# Altium PCB HW_FPGA_Board.PcbDoc
Units mm, origin at the board's own origin, x right, y up, seen from the top; angles counter-clockwise.
Board outline 100 x 100 mm, 2 copper layers (Top Layer, Bottom Layer); 81 components, 29 nets, 606 pads, 100 vias.
Unrouted connection lines stored in the file: 200.
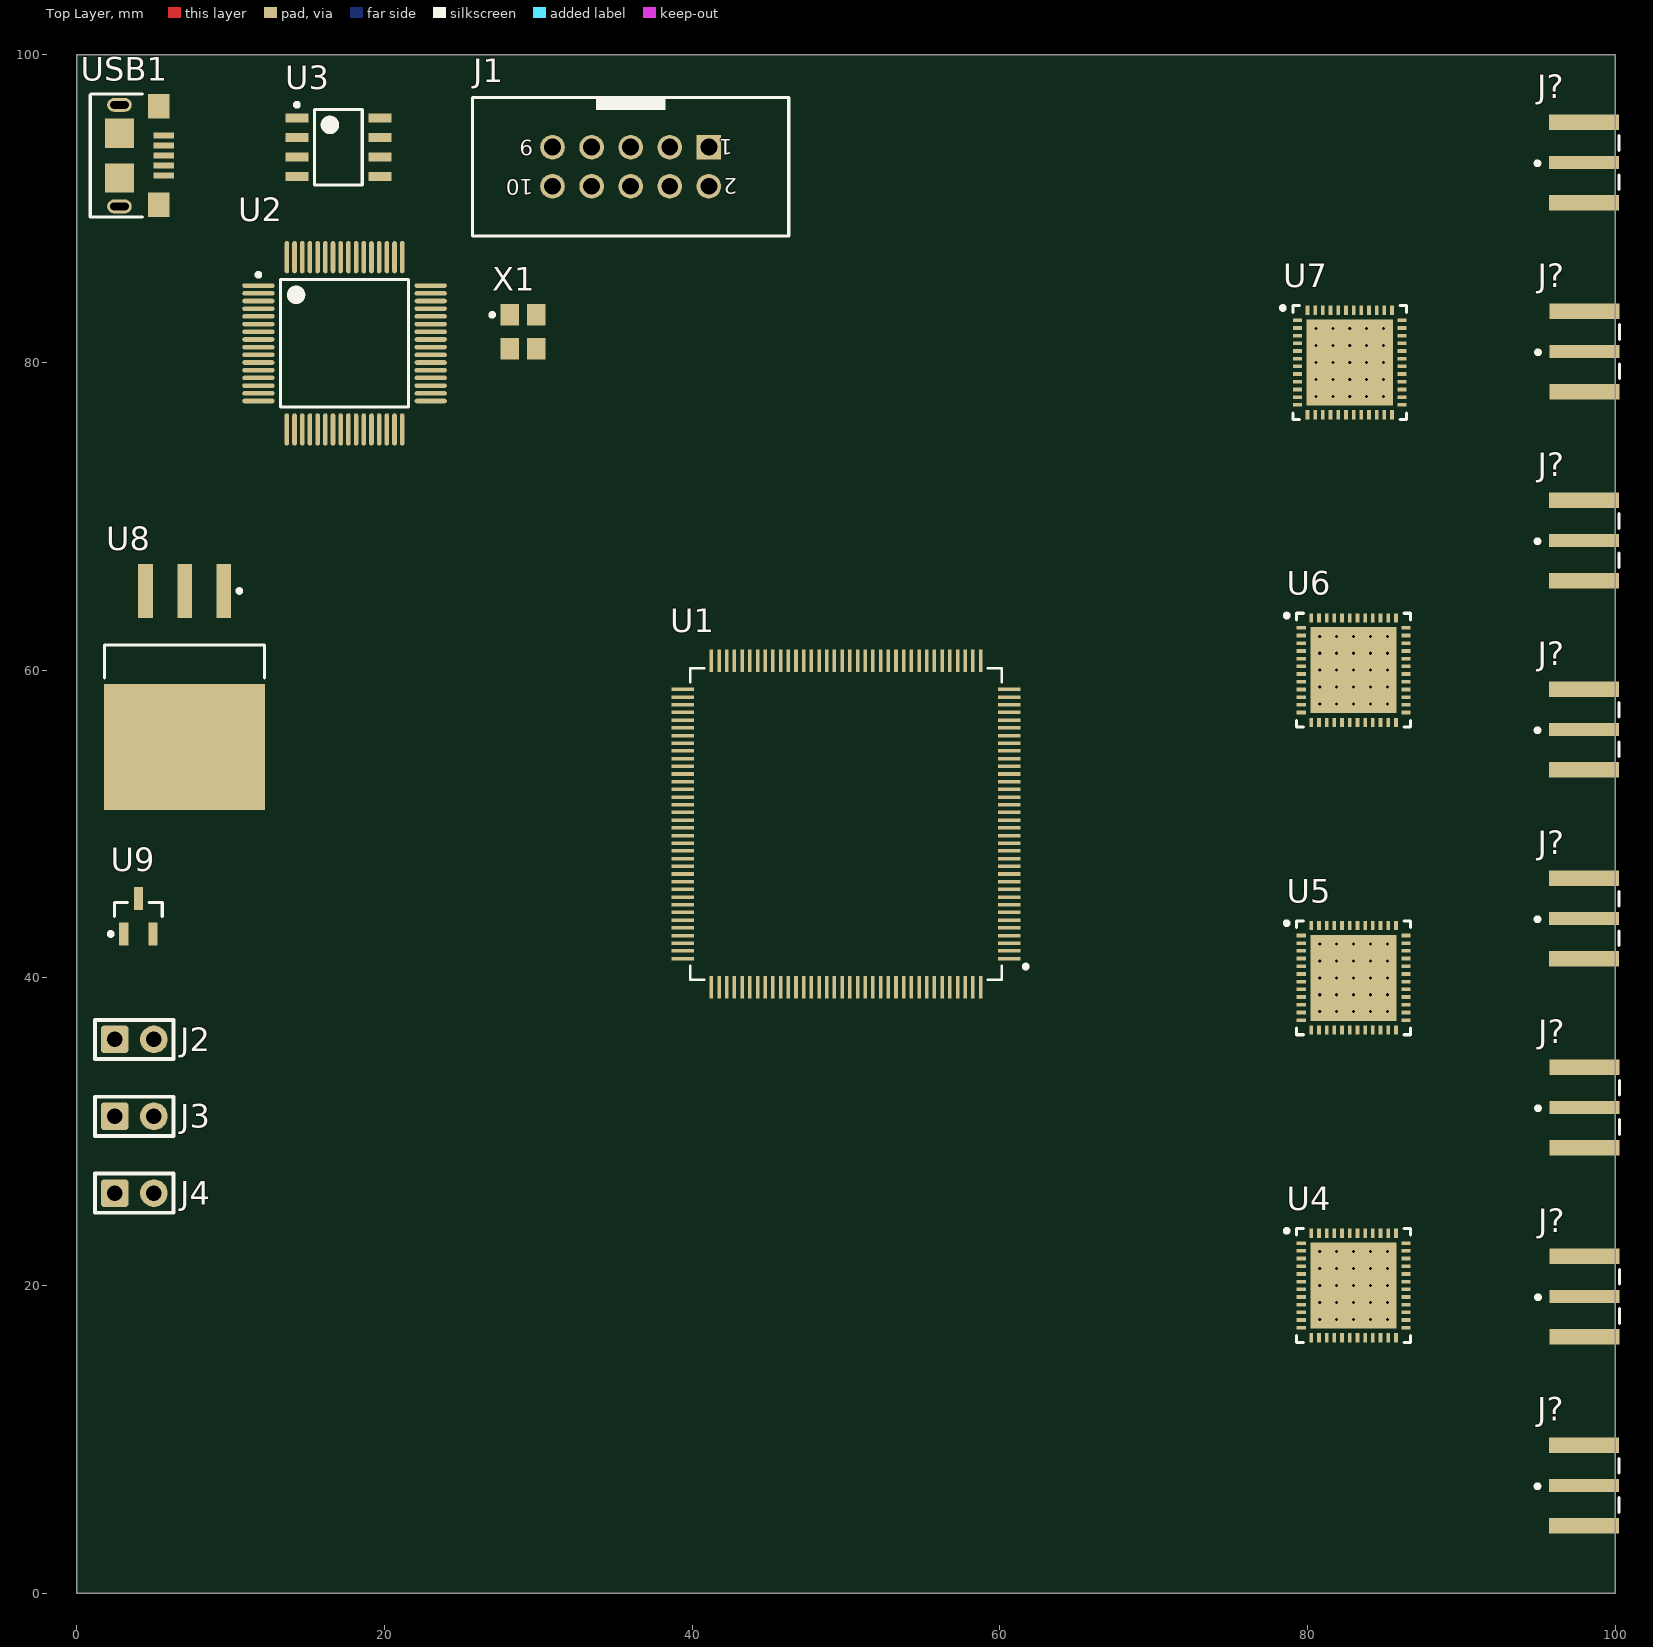
[diagram p0: Top Layer view]
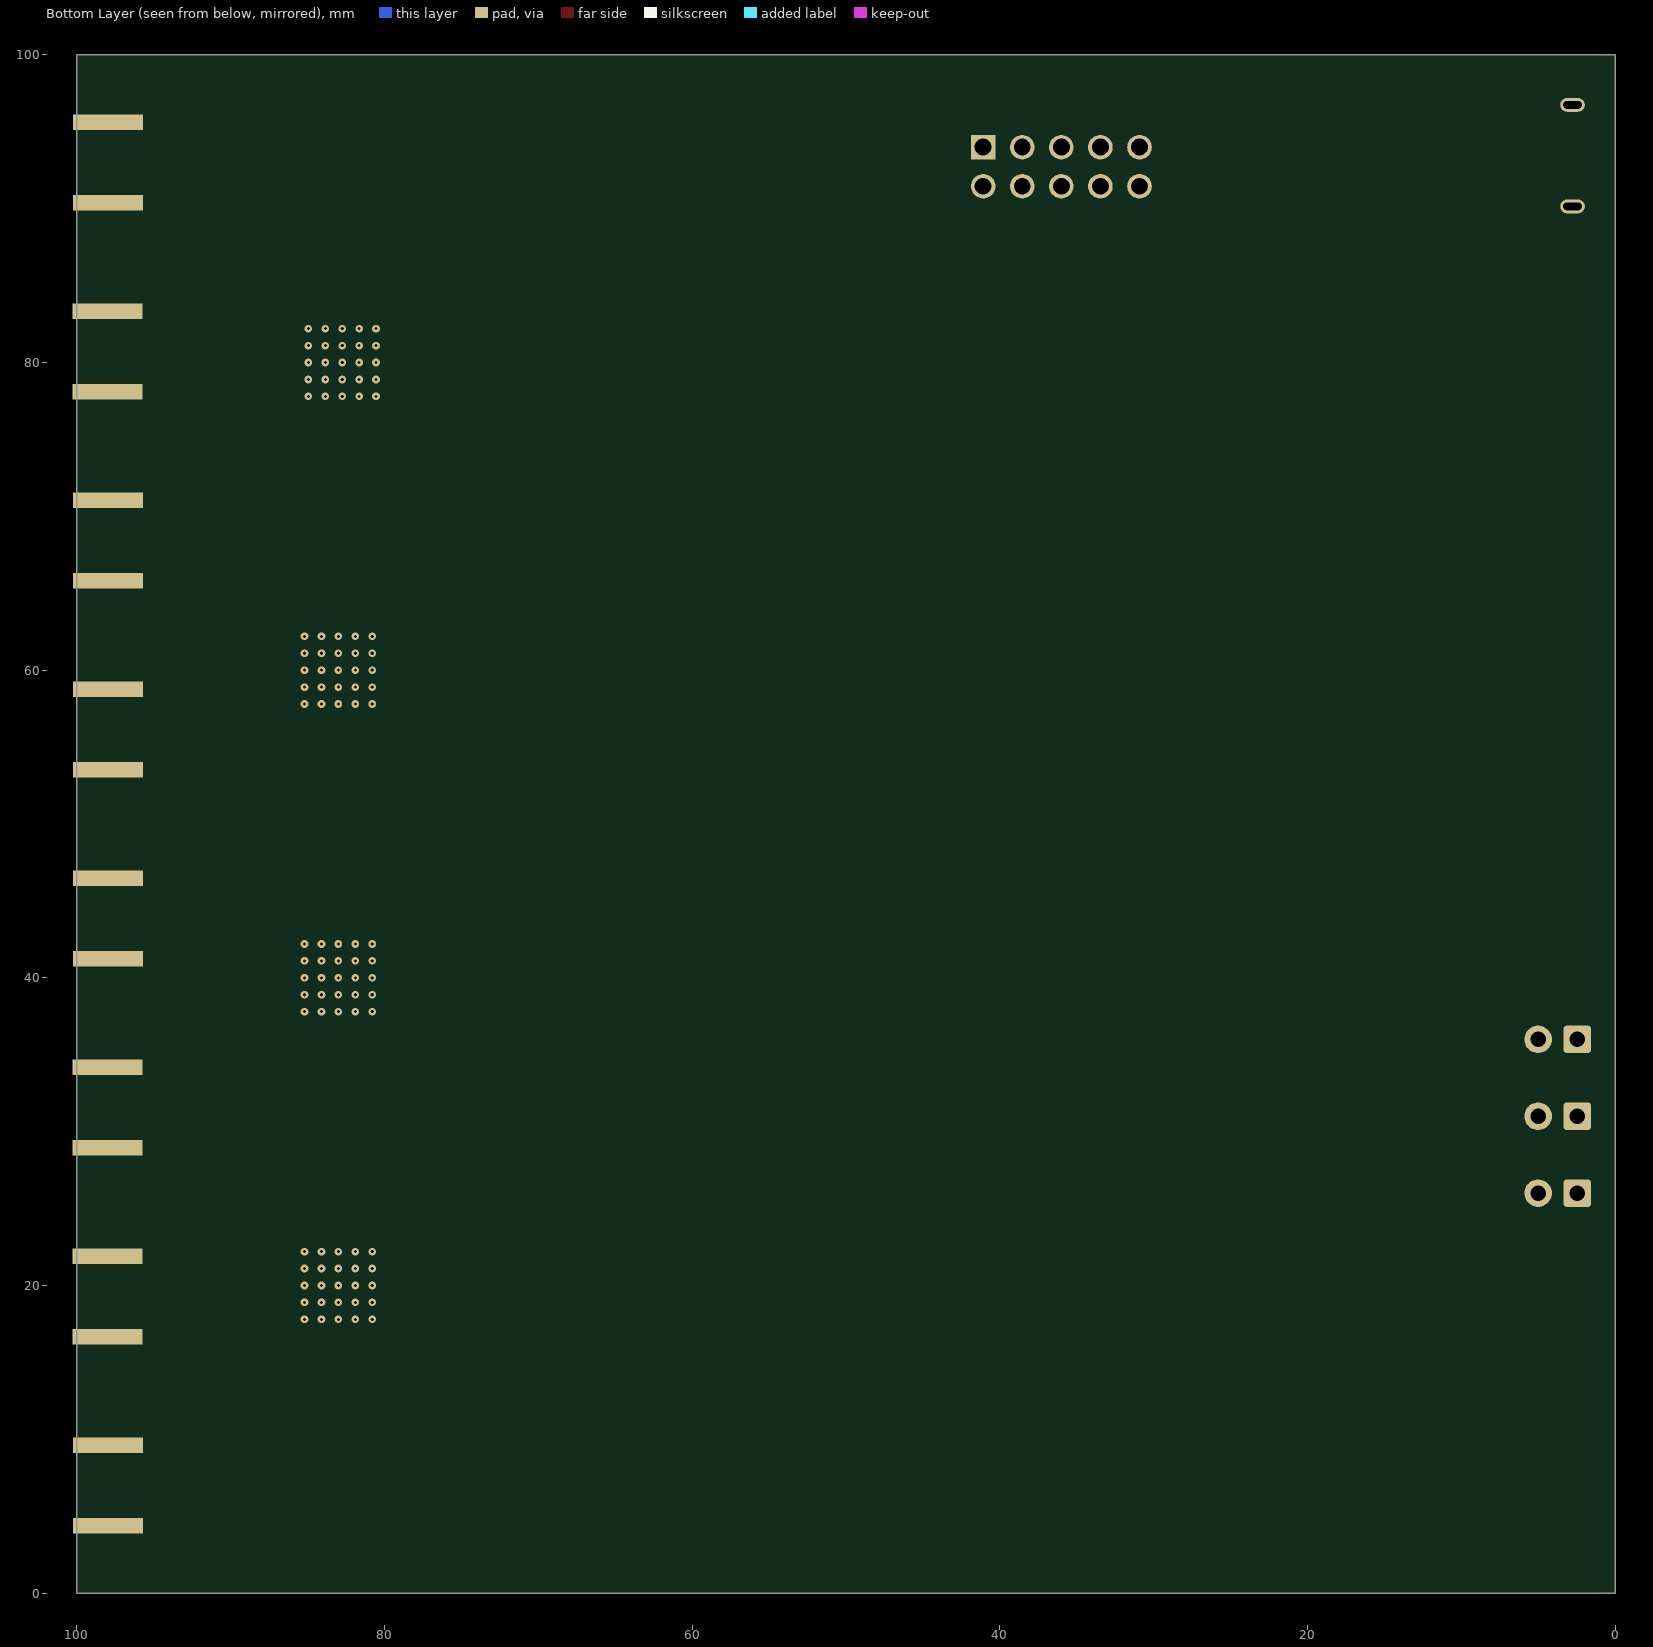
[diagram p1: Bottom Layer view, seen from below]

## Layer stack, top to bottom
Top Solder: solder mask 0.0102, Solder Resist, Dk 3.5
Top Layer: signal copper 0.0356
Dielectric 1: dielectric 0.32, FR-4, Dk 4.8
Bottom Layer: signal copper 0.0356
Bottom Solder: solder mask 0.0102, Solder Resist, Dk 3.5

## Board outline
0,0 100,0 100,100 0,100

## Design rules (kind name [scope] priority, off if disabled: settings)
Clearance [All] p1: gap=0.254 ignorepadtopadclearanceinfootprint=FALSE except(0: Arc-Hole Track-Hole SMDPad-Hole THPad-Hole Via-Hole Fill-Hole Poly-Hole Region-Hole Text-Hole)
DiffPairsRouting [All] p1: maxlimit=0.254 minlimit=0.254 mostfreqgap=0.254 toplayer_minwidth=0.381 toplayer_maxwidth=0.381 toplayer_prefwidth=0.381 bottomlayer_minwidth=0.381 bottomlayer_maxwidth=0.381 bottomlayer_prefwidth=0.381 maxuncoupledlength=12.7
PolygonConnect [All] p1: connectstyle=Relief reliefconductorwidth=0.254 reliefentries=4 polygonreliefangle="90 Angle" airgapwidth=0.254
RoutingVias [All] p1: holewidth=0.711 width=1.27 viastyle="Through Hole" minholewidth=0.711 minwidth=1.27 maxholewidth=0.711 maxwidth=1.27
SolderMaskExpansion [All] p1: expansion=0.102 istentingtop=FALSE
Width [All] p1: maxlimit=0.254 minlimit=0.254 preferedwidth=0.254
29 further rules are at their usual default settings.

## Classes and differential pairs
differential pair class USB: USB_D
component class Power: C16 C17 C18 C19 C20 C21 C22 C23 C24 C25 C26 C27 C28 C29 C30 C31 C32 C33 C34 C35 C36 C37 C38 C39 D1 D2 D3 J2 J3 J4 R11 R12 R13 U8 U9
component class JTAG: C1 C2 C3 C4 C5 C6 C7 C8 C9 C10 C11 C12 C13 C14 C15 J1 L1 L2 L3 R1 R2 R3 R4 R5 R6 R7 R8 R9 R10 U2 U3 USB1 X1
component class FPGA: U1
component class ADC4: J? U7
component class ADC3: J? U6
component class ADC2: J? U5
component class ADC1: J? U4
differential pair USB_D: +USB_D_P -USB_D_N

## Components (designator, comment, footprint, x,y, rotation, side; value= is the part's Value field where it differs from the comment)
C1 "C0603 100nF 25V X7R" C0603-HIGH-DENSITY 270,104 r90 top value=100nF
C2 "C0603 4.7uF 6.3V X5R" C0603-HIGH-DENSITY 274,104 r90 top value=4.7uF
C3 "C0603 100nF 25V X7R" C0603-HIGH-DENSITY 235,104 r90 top value=100nF
C4 "C0603 100nF 25V X7R" C0603-HIGH-DENSITY 240,104 r90 top value=100nF
C5 "C0603 100nF 25V X7R" C0603-HIGH-DENSITY 244,104 r90 top value=100nF
C6 "C0603 100nF 25V X7R" C0603-HIGH-DENSITY 248,104 r90 top value=100nF
C7 "C0603 100nF 25V X7R" C0603-HIGH-DENSITY 253,104 r90 top value=100nF
C8 "C0603 100nF 25V X7R" C0603-HIGH-DENSITY 218,104 r90 top value=100nF
C9 "C0603 4.7uF 6.3V X5R" C0603-HIGH-DENSITY 222,104 r90 top value=4.7uF
C10 "C0603 100nF 25V X7R" C0603-IPC 202,104 r90 top value=100nF
C11 "C0603 10uF 10V X5R" C0603-HIGH-DENSITY 157,104 r90 top value=10uF
C12 "C0603 100nF 25V X7R" C0603-HIGH-DENSITY 162,104 r90 top value=100nF
C13 "C0603 100nF 25V X7R" C0603-HIGH-DENSITY 124,104 r90 top value=100nF
C14 "C0603 18pF 50V C0G_1" C0603-HIGH-DENSITY 102,104 r90 top value=18pF
C15 "C0603 18pF 50V C0G_1" C0603-HIGH-DENSITY 108,104 r90 top value=18pF
C16 "C0603 10uF 35V X5R" C0603-HIGH-DENSITY 262,126 r90 top value=10uF
C17 "C0603 10uF 35V X5R" C0603-HIGH-DENSITY 267,126 r90 top value=10uF
C18 "C0603 1uF 25V X7R" C0603-IPC 273,125 r90 top value=1uF
C19 "C0603 1uF 25V X7R" C0603-IPC 279,125 r90 top value=1uF
C20 "C0603 100nF 25V X7R" C0603-HIGH-DENSITY 102,126 r90 top value=100nF
C21 "C0603 100nF 25V X7R" C0603-HIGH-DENSITY 108,126 r90 top value=100nF
C22 "GRM155R71H104KE14D" C0402-HIGH-DENSITY 113,126 r90 top value=0.1uF
C23 "C0603 100nF 25V X7R" C0603-HIGH-DENSITY 119,126 r90 top value=100nF
C24 "C0603 100nF 25V X7R" C0603-HIGH-DENSITY 125,126 r90 top value=100nF
C25 "C0603 100nF 25V X7R" C0603-HIGH-DENSITY 131,126 r90 top value=100nF
C26 "C0603 100nF 25V X7R" C0603-HIGH-DENSITY 137,126 r90 top value=100nF
C27 "C0603 10uF 10V X5R" C0603-HIGH-DENSITY 143,126 r90 top value=10uF
C28 "C0603 100nF 25V X7R" C0603-HIGH-DENSITY 149,126 r90 top value=100nF
C29 "C0603 100nF 25V X7R" C0603-HIGH-DENSITY 154,126 r90 top value=100nF
C30 "GRM155R71H104KE14D" C0402-HIGH-DENSITY 160,126 r90 top value=0.1uF
C31 "C0402 10uF 10V" C0402-HIGH-DENSITY 166,126 r90 top value=10uF
C32 "C0603 100nF 25V X7R" C0603-HIGH-DENSITY 172,126 r90 top value=100nF
C33 "GRM155R71H104KE14D" C0402-HIGH-DENSITY 177,126 r90 top value=0.1uF
C34 "C0603 100nF 25V X7R" C0603-HIGH-DENSITY 183,126 r90 top value=100nF
C35 "C0603 10uF 10V X5R" C0603-HIGH-DENSITY 189,126 r90 top value=10uF
C36 "C0603 100nF 25V X7R" C0603-HIGH-DENSITY 195,126 r90 top value=100nF
C37 "GRM155R71H104KE14D" C0402-HIGH-DENSITY 201,126 r90 top value=0.1uF
C38 "GRM155R71H104KE14D" C0402-HIGH-DENSITY 206,126 r90 top value=0.1uF
C39 "C0603 10uF 10V X5R" C0603-HIGH-DENSITY 212,126 r90 top value=10uF
D1 "5V" LED0603-IPC 232,126 r0 top
D2 "3.3V" LED0603-IPC 237,126 r0 top
D3 "1.8V" LED0603-IPC 242,126 r0 top
J1 "JTAG" 61201021621 36,92.73 r180 top
J2 "Header 1X2" "Header 1x2 TH Pitch 2.54mm" 2.46,36 r0 top
J3 "Header 1X2" "Header 1x2 TH Pitch 2.54mm" 2.46,31 r0 top
J4 "Header 1X2" "Header 1x2 TH Pitch 2.54mm" 2.46,26 r0 top
J? "SMA" "SMA Edge Launch (Horizontal)" 105,7 r270 top
J? "SMA" "SMA Edge Launch (Horizontal)" 105.03,19.286 r270 top
J? "SMA" "SMA Edge Launch (Horizontal)" 105,43.857 r270 top
J? "SMA" "SMA Edge Launch (Horizontal)" 105.03,31.571 r270 top
J? "SMA" "SMA Edge Launch (Horizontal)" 105,68.429 r270 top
J? "SMA" "SMA Edge Launch (Horizontal)" 105,56.143 r270 top
J? "SMA" "SMA Edge Launch (Horizontal)" 105.03,80.714 r270 top
J? "SMA" "SMA Edge Launch (Horizontal)" 105,93 r270 top
L1 "Ferrite Bead" L0603 279,105 r0 top value="600R 100MHz"
L2 "Ferrite Bead" L0603 227,105 r0 top value="600R 100MHz"
L3 "Ferrite Bead" L0603 182,105 r0 top value="600R 100MHz"
R1 "R0603 4.99K 0.1%" R0603-HIGH-DENSITY 258,105 r0 top value=4.99k
R2 "R0603 4.99K 0.1%" R0603-HIGH-DENSITY 262,105 r0 top value=4.99k
R3 "R0603 4.99K 0.1%" R0603-HIGH-DENSITY 266,105 r0 top value=4.99k
R4 "R0603 2.2K 1%" R0603-IPC 232,105 r0 top value=2.2k
R5 "R0603 2.2K 1%" R0603-IPC 168,105 r0 top value=2.2k
R6 "R0603 12k 1%" R0603-HIGH-DENSITY 153,105 r0 top value=12k
R7 "R0603 10K 1%" R0603-IPC 140,105 r0 top value=10k
R8 "R0603 10K 1%" R0603-IPC 144,105 r0 top value=10k
R9 "R0603 10K 1%" R0603-IPC 149,105 r0 top value=10k
R10 "R0603 2.2K 1%" R0603-IPC 119,104 r90 top value=2.2k
R11 "R0603 1K 1%" R0603-IPC-1K 246,126 r0 top value=1k
R12 "R0603 1K 1%" R0603-IPC-1K 251,125 r90 top value=1k
R13 "R0603 1K 1%" R0603-IPC-1K 256,125 r90 top value=1k
U1 "LCMXO2-4000" TQFP144 50,50 r180 top
U2 "FT2232HL-Reel" LQFP-64_M 17.4,81.25 r0 top
U3 "EEPROM 2Kb SPI" SOIC127P600X175-8N 17,94 r0 top
U4 "ADS58B19" VQFN48 83,20 r0 top
U5 "ADS58B19" VQFN48 83,40 r0 top
U6 "ADS58B19" VQFN48 83,60 r0 top
U7 "ADS58B19" VQFN48 82.75,80 r0 top
U8 "LD1086D2M33TR" D2PAK_A_L 7,58.9 r270 top
U9 "MCP1703T-1802E/CB" SOT-23A-CB3_N 4,44 r90 top
USB1 "USB micro-B" USB-MicroB 2.769,93.45 r270 top
X1 "ABM8G-12.000MHZ-18-D2Y-T" ABRACON_ABM8G_V 29,82 r0 top

## Footprints (in the part's own frame and the unit in brackets; to place one, negate y for a bottom-side part, rotate by r counter-clockwise, add the part's x,y. Pads: shape width x height; smd on the part's side, far side on the other; paste and mask are expansions set on the pad)
61201021621 [mm] "10 pins, straight, gold plating"
  rect 1.6x1.6 hole 1.1: 1(-5.08,-1.27)
  round 1.6 hole 1.1: 2(-5.08,1.27) 3(-2.54,-1.27) 4(-2.54,1.27) 5(0,-1.27) 6(0,1.27) 7(2.54,-1.27) 8(2.54,1.27) 9(5.08,-1.27) 10(5.08,1.27)
  silkscreen extent -10.28,-4.5 10.28,4.5, body extent -10.18,-4.42 10.18,4.75, height 9.13
ABRACON_ABM8G_V [mm] "SMD, 4-Leads, Body 2.6x3.3mm"
  rect 1.2x1.4 smd: 1(-0.85,1.1) 2(-0.85,-1.1) 3(0.85,-1.1) 4(0.85,1.1)
  silkscreen extent -2.12,0.98 -1.87,1.22, body extent -1.3,-1.65 1.3,1.65, height 1.01
C0402-HIGH-DENSITY [mil] "Chip Capacitor, 2-Leads, Body 1.02x0.51mm, IPC High Density"
  rect 25x19 smd: 1(-16,0) 2(16,0)
  body extent -20,-12 20,12, height 8
C0603-HIGH-DENSITY [mm] "Chip Capacitor, 2-Leads, Body 1.60x0.80mm, IPC High Density"
  rect 0.8x0.9 smd: 1(-0.6,0) 2(0.6,0)
  body extent -0.8,-0.4 0.8,0.4, height 0.3
C0603-IPC [mm]
  rect 1.1x1 smd: 1(-0.85,0) 2(0.85,0)
  silkscreen extent -0.24,-0.7 0.26,0.7, body extent -0.8,-0.4 0.8,0.4, height 0.3
D2PAK_A_L [mm] "D2-PAK, 4-Leads, Body 9.2x10.2mm, Pitch 2.54mm, Lead Span 15.4mm, IPC High Density"
  rect 3.5x0.95 smd: 1(-6.25,2.54) 2(-6.25,0) 3(-6.25,-2.54)
  rect 8.2x10.45 smd: 4(3.9,0)
  silkscreen extent -6.37,-5.2 -0.6,5.2, body extent -2.75,-5.2 6.6,5.2, height 4.6
"Header 1x2 TH Pitch 2.54mm" [mm] "PinHeader 1x2 TH Pitch 2.54mm"
  rrect25% 1.8x1.8 hole 1: 1(0,0)
  round 1.8 hole 1: 2(2.54,0)
  silkscreen extent -1.27,-1.27 3.81,1.27, body extent -1.27,-1.27 3.81,1.27, height 9.5
L0603 [mm]
  rect 0.94x1.02 smd: 1(-0.79,0) 2(0.79,0)
  body extent -0.8,-0.4 0.8,0.4, height 1
LED0603-IPC [mm]
  rect 1.1x1 smd: A(0.85,0) K(-0.85,0)
  silkscreen extent -1.68,-0.7 0.25,0.7, body extent -0.8,-0.4 0.8,0.4, height 1.1
LQFP-64_M [mm] "Thin QFP, 64-Leads, Body 10x10mm, Pitch 0.5mm, IPC Low Density"
  oval 2.1x0.3 smd: 1(-5.6,3.75) 2(-5.6,3.25) 3(-5.6,2.75) 4(-5.6,2.25) 5(-5.6,1.75) 6(-5.6,1.25) 7(-5.6,0.75) 8(-5.6,0.25) 9(-5.6,-0.25) 10(-5.6,-0.75) 11(-5.6,-1.25) 12(-5.6,-1.75) 13(-5.6,-2.25) 14(-5.6,-2.75) 15(-5.6,-3.25) 16(-5.6,-3.75) 33(5.6,-3.75) 34(5.6,-3.25) 35(5.6,-2.75) 36(5.6,-2.25) 37(5.6,-1.75) 38(5.6,-1.25) 39(5.6,-0.75) 40(5.6,-0.25) 41(5.6,0.25) 42(5.6,0.75) 43(5.6,1.25) 44(5.6,1.75) 45(5.6,2.25) 46(5.6,2.75) 47(5.6,3.25) 48(5.6,3.75)
  oval 0.3x2.1 smd: 17(-3.75,-5.6) 18(-3.25,-5.6) 19(-2.75,-5.6) 20(-2.25,-5.6) 21(-1.75,-5.6) 22(-1.25,-5.6) 23(-0.75,-5.6) 24(-0.25,-5.6) 25(0.25,-5.6) 26(0.75,-5.6) 27(1.25,-5.6) 28(1.75,-5.6) 29(2.25,-5.6) 30(2.75,-5.6) 31(3.25,-5.6) 32(3.75,-5.6) 49(3.75,5.6) 50(3.25,5.6) 51(2.75,5.6) 52(2.25,5.6) 53(1.75,5.6) 54(1.25,5.6) 55(0.75,5.6) 56(0.25,5.6) 57(-0.25,5.6) 58(-0.75,5.6) 59(-1.25,5.6) 60(-1.75,5.6) 61(-2.25,5.6) 62(-2.75,5.6) 63(-3.25,5.6) 64(-3.75,5.6)
  silkscreen extent -5.72,-4.15 4.15,4.57, body extent -5,-5 5,5, height 1.6
R0603-HIGH-DENSITY [mm] "Chip Resistor, 2-Leads, Body 1.60x0.80mm, IPC High Density"
  rect 0.6x0.8 smd: 1(-0.65,0) 2(0.65,0)
  body extent -0.77,-0.43 0.78,0.43, height 0.44
R0603-IPC [mm]
  rect 1.1x1 smd: 1(-0.85,0) 2(0.85,0)
  silkscreen extent -0.25,-0.7 0.25,0.7, body extent -0.77,-0.43 0.78,0.43, height 0.44
R0603-IPC-1K [mm] "1K 0603 Resistor"
  rect 1.1x1 smd: 1(-0.85,0) 2(0.85,0)
  silkscreen extent -0.25,-0.7 0.25,0.7, body extent -0.77,-0.43 0.78,0.43, height 0.44
"SMA Edge Launch (Horizontal)" [mm]
  rect 0.85x4.56 smd paste+0 mask+0: 1(0,-7.03)
  rect 1x4.56 smd paste+0 mask+0: 2(-2.62,-7.03) 2(2.62,-7.03)
  rect 1x4.56 smd far side paste+0 mask+0: 2(-2.62,-7.03) 2(2.62,-7.03)
  silkscreen extent -1.75,-10.17 1.75,-4.75, body extent -3.19,-8.25 3.19,5.05, height 3.58
SOIC127P600X175-8N [mm] "SOIC, 8-Leads, Body 4.90x3.90mm, Pitch 1.27mm, IPC Medium Density"
  rect 1.5x0.6 smd: 1(-2.7,1.905) 2(-2.7,0.635) 3(-2.7,-0.635) 4(-2.7,-1.905) 5(2.7,-1.905) 6(2.7,-0.635) 7(2.7,0.635) 8(2.7,1.905)
  silkscreen extent -2.82,-2.45 1.55,2.88, body extent -3,-2.45 3,2.45, height 1.75
SOT-23A-CB3_N [mm] "SOT346, 3-Leads, Body 2.9x1.5mm, Pitch 0.95mm, Lead Span 2.6mm, IPC Medium Density"
  rect 1.5x0.6 smd: 1(-1.15,0.95) 2(-1.15,-0.95) 3(1.15,0)
  silkscreen extent -1.27,-1.55 0.9,1.92, body extent -0.9,-1.55 0.9,1.55, height 1.45
TQFP144 [mil] "LatticeMXO2 TQFP144"
  rect 58x9 smd paste+0: 1(-418,344.49) 2(-418,324.8) 3(-418,305.12) 4(-418,285.43) 5(-418,265.75) 6(-418,246.06) 7(-418,226.38) 8(-418,206.69) 9(-418,187.01) 10(-418,167.32) 11(-418,147.64) 12(-418,127.95) 13(-418,108.27) 14(-418,88.58) 15(-418,68.9) 16(-418,49.21) 17(-418,29.53) 18(-418,9.84) 19(-418,-9.84) 20(-418,-29.53) 21(-418,-49.21) 22(-418,-68.9) 23(-418,-88.58) 24(-418,-108.27) 25(-418,-127.95) 26(-418,-147.64) 27(-418,-167.32) 28(-418,-187.01) 29(-418,-206.69) 30(-418,-226.38) 31(-418,-246.06) 32(-418,-265.75) 33(-418,-285.43) 34(-418,-305.12) 35(-418,-324.8) 36(-418,-344.49) 73(418,-344.49) 74(418,-324.8) 75(418,-305.12) 76(418,-285.43) 77(418,-265.75) 78(418,-246.06) 79(418,-226.38) 80(418,-206.69) 81(418,-187.01) 82(418,-167.32) 83(418,-147.64) 84(418,-127.95) 85(418,-108.27) 86(418,-88.58) 87(418,-68.9) 88(418,-49.21) 89(418,-29.53) 90(418,-9.84) 91(418,9.84) 92(418,29.53) 93(418,49.21) 94(418,68.9) 95(418,88.58) 96(418,108.27) 97(418,127.95) 98(418,147.64) 99(418,167.32) 100(418,187.01) 101(418,206.69) 102(418,226.38) 103(418,246.06) 104(418,265.75) 105(418,285.43) 106(418,305.12) 107(418,324.8) 108(418,344.49)
  rect 9x58 smd paste+0: 37(-344.49,-418) 38(-324.8,-418) 39(-305.12,-418) 40(-285.43,-418) 41(-265.75,-418) 42(-246.06,-418) 43(-226.38,-418) 44(-206.69,-418) 45(-187.01,-418) 46(-167.32,-418) 47(-147.64,-418) 48(-127.95,-418) 49(-108.27,-418) 50(-88.58,-418) 51(-68.9,-418) 52(-49.21,-418) 53(-29.53,-418) 54(-9.84,-418) 55(9.84,-418) 56(29.53,-418) 57(49.21,-418) 58(68.9,-418) 59(88.58,-418) 60(108.27,-418) 61(127.95,-418) 62(147.64,-418) 63(167.32,-418) 64(187.01,-418) 65(206.69,-418) 66(226.38,-418) 67(246.06,-418) 68(265.75,-418) 69(285.43,-418) 70(305.12,-418) 71(324.8,-418) 72(344.49,-418) 109(344.49,418) 110(324.8,418) 111(305.12,418) 112(285.43,418) 113(265.75,418) 114(246.06,418) 115(226.38,418) 116(206.69,418) 117(187.01,418) 118(167.32,418) 119(147.64,418) 120(127.95,418) 121(108.27,418) 122(88.58,418) 123(68.9,418) 124(49.21,418) 125(29.53,418) 126(9.84,418) 127(-9.84,418) 128(-29.53,418) 129(-49.21,418) 130(-68.9,418) 131(-88.58,418) 132(-108.27,418) 133(-127.95,418) 134(-147.64,418) 135(-167.32,418) 136(-187.01,418) 137(-206.69,418) 138(-226.38,418) 139(-246.06,418) 140(-265.75,418) 141(-285.43,418) 142(-305.12,418) 143(-324.8,418) 144(-344.49,418)
  silkscreen extent -465,-399 399,399, body extent -433,-433 433,433, height 63
USB-MicroB [mm] "CONN RCPT USB TYPE B 3A"
  oval 0.9x1.6 hole 0.5 slot 1.2 at 90 deg: 0(-3.3,0) 0(3.3,0)
  rect 1.6x1.4 smd: 0(-3.2,2.55) 0(3.2,2.55)
  rect 1.9x1.9 smd: 0(-1.45,0) 0(1.45,0)
  rect 0.4x1.35 smd: 1(-1.3,2.875) 2(-0.65,2.875) 3(0,2.875) 4(0.65,2.875) 5(1.3,2.875)
  silkscreen extent -4,-1.9 4,1.5, body extent -3.93,-2.76 3.93,2.9, height 2.88
VQFN48 [mm] "VQFN, 48-Leads, 7.00x7.00mm, Pitch 0.50mm"
  rect 0.6x0.24 smd: 1(-3.4,2.75) 2(-3.4,2.25) 3(-3.4,1.75) 4(-3.4,1.25) 5(-3.4,0.75) 6(-3.4,0.25) 7(-3.4,-0.25) 8(-3.4,-0.75) 9(-3.4,-1.25) 10(-3.4,-1.75) 11(-3.4,-2.25) 12(-3.4,-2.75) 25(3.4,-2.75) 26(3.4,-2.25) 27(3.4,-1.75) 28(3.4,-1.25) 29(3.4,-0.75) 30(3.4,-0.25) 31(3.4,0.25) 32(3.4,0.75) 33(3.4,1.25) 34(3.4,1.75) 35(3.4,2.25) 36(3.4,2.75)
  rect 0.24x0.6 smd: 13(-2.75,-3.4) 14(-2.25,-3.4) 15(-1.75,-3.4) 16(-1.25,-3.4) 17(-0.75,-3.4) 18(-0.25,-3.4) 19(0.25,-3.4) 20(0.75,-3.4) 21(1.25,-3.4) 22(1.75,-3.4) 23(2.25,-3.4) 24(2.75,-3.4) 37(2.75,3.4) 38(2.25,3.4) 39(1.75,3.4) 40(1.25,3.4) 41(0.75,3.4) 42(0.25,3.4) 43(-0.25,3.4) 44(-0.75,3.4) 45(-1.25,3.4) 46(-1.75,3.4) 47(-2.25,3.4) 48(-2.75,3.4)
  rect 5.6x5.6 smd: 49(0,0)
  silkscreen extent -4.47,-3.7 3.7,3.7, body extent -3.55,-3.55 3.55,3.55, height 1

## Part data
C1 C3 C4 C5 C6 C7 C8 C10 C12 C13 C20 C21 C23 C24 C25 C26 C28 C29 C32 C34 C36: "Chip Capacitor, 0603, 100nF, 25V, X7R", Max. Voltage=25V, Supplier Part Number 1=490-1524-1-ND, EIA Code=X7R, Supplier 1=Digi-Key
C2 C9: library part "C0402 4.7uF 6.3V X5R", "Chip Capacitor, 0603, 4.7uF, 10V, X5R", Max. Voltage=10V, Supplier Part Number 1=1276-1907-1-ND, EIA Code=X5R, Supplier 1=Digi-Key
C11 C27 C35 C39: "Chip Capacitor, 0603, 10uF, 10V, X5R", Max. Voltage=10V, Supplier Part Number 1=490-10474-1-ND, EIA Code=X7R, Supplier 1=Digi-Key
C14 C15: library part "C0402 18pF 50V C0G_1", "Chip Capacitor, 0603, 18pF, 25V, C0G", Max. Voltage=25V, Supplier Part Number 1=399-9019-1-ND, EIA Code=C0G, Supplier 1=Digi-Key
C16 C17: "10µF ±20% 35V Ceramic Capacitor X5R 0603 (1608 Metric)", Supplier Part Number 1=490-13248-1-ND, Supplier 1=Digi-Key
C18 C19: "CAP CER 1UF 25V X7R 0603", Max. Voltage=25V, Supplier Part Number 1=445-173615-1-ND, EIA Code=X7R, Features="Soft Termination", Supplier 1=Digi-Key
C22 C30 C33 C37 C38: library part "C0402 0.1uF 50V X7R", "Chip Capacitor, 0402, 0.10uF, 50V, X7R", Supplier Part Number 1=490-10700-1-ND, Supplier 1=Digi-Key
C31: "Chip Capacitor, 0402, 10uF, 10V, X5R", Max. Voltage=10V, Supplier Part Number 1=1276-1450-2-ND, EIA Code=X5R, Supplier 1=Digi-Key
D1 D2 D3: library part "LED 0603 Green", "LED GREEN CLEAR 0603 SMD", Supplier Part Number 1=732-4971-1-ND, Supplier 1=Digi-Key
J1: library part CMP-1502-00007-1, "Male Box Header WR-BHD, THT, Vertical, pitch 2.54 mm, 10 pins", Contact Resistance=20mOhm, Manufacturer="Wurth Elektronik", Operating Temperature=-40to125degC, Package Reference=61201021621, Withstanding Voltage=500VAC, Working Voltage=250VAC, Datasheet URL=https://katalog.we-online.de/em/datasheet/6120xx21621.pdf, Gender=Male, Manufacturer URL=http://www.we-online.de, Mounting Technology=THT, Orientation=Vertical, Packaging=Tray, Part Number=61201021621, Pin Number=10, Pitch=2.54mm, Published Date=August2018, Publisher=WurthElektronik
J? J? J? J? J? J? J? J?: "SMA Connector", Supplier Part Number 1=A97594-ND, Supplier 1=Digi-Key
L1 L2 L3: library part "FB 0603 600R @ 100MHz", "600 Ohms @ 100MHz 1 Ferrite Bead 0603 (1608 Metric) 500mA 380mOhm", Supplier Part Number 1=490-1014-1-ND, Supplier 1=Digi-Key
R1 R2 R3: "RES SMD 4.99KOHM 0.1% 1/10W 0603", Operating Temperature="-55°C ~ 155°C", Supplier Part Number 1=P4.99KDBCT-ND, Temperature Coefficient=±25ppm/°C, Tolerance=±0.1%, Features="Automotive AEC-Q200", Supplier 1=Digi-Key
R4 R5 R10: "RES SMD 2.2K OHM 1% 1/10W 0603", Operating Temperature="-55°C ~ 155°C", Supplier Part Number 1=RMCF0603FT2K20CT-ND, Temperature Coefficient=±100ppm/°C, Features="Automotive AEC-Q200", Supplier 1=Digi-Key
R6: "RES 12K OHM 1% 1/10W 0603", Supplier Part Number 1=541-12.0KHCT-ND, Supplier 1=Digi-Key
R7 R8 R9: "RES SMD 10K OHM 1% 1/10W 0603", Supplier Part Number 1=RMCF0603FT10K0CT-ND, Supplier 1=Digi-Key
R11 R12 R13: "RES SMD 1K OHM 1% 1/10W 0603", Operating Temperature="-55°C ~ 155°C", Supplier Part Number 1=RMCF0603FG1K00CT-ND, Temperature Coefficient=±100ppm/°C, Tolerance=±1%, Features="Automotive AEC-Q200", Supplier 1=Digi-Key
U1: library part MachXO2-4000-TG144, MANF="Lattice Semiconductor Corporation", MANF_PN=LCMXO2-4000HC-4TG144C, Vendor=DigiKey, VENDOR_PN=220-1460-ND
U2: library part CMP-0078-00023-3, "Dual High Speed USB To Multipurpose UART/FIFO IC, 64-pin LQFP, Tape and Reel", Manufacturer=FTDI, ComponentLink1Description="Manufacturer URL", ComponentLink1URL=http://www.ftdichip.com/, ComponentLink2Description=Datasheet, ComponentLink2URL=http://www.ftdichip.com/Support/Documents/DataSheets/ICs/DS_FT2232H.pdf, DatasheetVersion="ver 2.21, Jun-2012", PackageDescription="64-Pin Thin Quad Flat Pack, 10 x 10 x 1.4 mm Body, 0.5 mm Pitch", PackageReference=LQFP-64, PackageVersion=Jun-12, PartNumber=FT2232HL-Reel, RevisionNote="DatasheetVersion updated to 2.21 Jun-2012"
U3: library part 93LC56C-I/SN, "EEPROM Memory IC 2Kb (256 x 8, 128 x 16) SPI 3MHz 8-SOIC", Supplier Part Number 1=93LC56C-I/SN-ND, Supplier 1=Digi-Key
U4 U5 U6 U7: "Single ADC Pipelined 250Msps 9-bit Parallel/LVDS 48-Pin VQFN", Supplier Part Number 1=296-28296-1-ND, Supplier 1=Digi-Key, Supplier 2=Mouser, Supplier Part Number 2=595-ADS58B19IRGZT
U8: library part CMP-0244-00505-1, "1.5A, Low Drop Positive Voltage Regulator, 3.3V, 4-Pin D2PAK/A, Tape and Reel", ComponentLink1Description="Manufacturer URL", ComponentLink1URL=http://www.st.com, ComponentLink2Description=Datasheet, ComponentLink2URL=http://www.st.com/internet/com/TECHNICAL_RESOURCES/TECHNICAL_LITERATURE/DATASHEET/CD00001884.pdf, DatasheetVersion=11/07/2011, PackageDescription="4-Pin Transistor Outline Package 2.54 mm Pitch, 15.4 mm Lead Span", PackageReference=D2PAK_A, PackageVersion=2011
U9: library part CMP-0136-00766-1, "250 mA, 16V, Low Quiescent Current LDO Regulator, 3-Pin SOT-23A, Extended Temperature, Tape and Reel", DatasheetVersion="revD, Sep-2009", PackageDescription="3-Lead Plastic Small Outline Transistor (CB) [SOT-23A]", PackageReference=SOT-23A-CB3, PackageVersion="revBB, Aug-2009"
USB1: "CONN RCPT USB TYPE B 3A", Manufacturer="Wurth Electronics Inc.", Manufacturer Part Number=629105150521, Supplier Part Number 1=609-4616-1-ND, Supplier 1=Digi-Key
X1: library part CMP-2000-05039-1, "Ultra Miniature Ceramic Glass Sealed SMD Cryastal, 12 MHz, 18 pF, +/- 20 ppm, -40 to 85 degC, 4-Pin SMD, RoHS, Tape and Reel", Case Height=1mm, Case Length=3.2mm, Case Width=2.5mm, Frequency=12MHz, Frequency Stability=30PPM, Load Capacitance=18pF, Manufacturer=ABRACON, Operating Temperature Range=-40Cto+85C, Package / Case=3.2mmx2.5mm, Tolerance=20PPM, Brand=ABRACON, Datasheet URL=https://datasheet.ciiva.com/15116/getdatasheetpartid-719790-15116701.pdf, Datasheet Version=Apr-17, Dimensions=2.5mmWx3.2mmLx1mmH, ESR=120Ohms, Factory Pack Quantity=1000, Manufacturer URL=http://www.abracon.com/, Mounting Style=SMD/SMT, Packaging=Reel, Product Category=Crystals, RoHS=Details, Series=ABM8G, Termination Style=SMD/SMT, Type=UltraMiniatureGlassSealedCrystal

## Via types
v1: diameter 0.5, hole 0.2, Top Layer to Bottom Layer, 100 vias

## Nets (pads, with @x,y where several pads share a name; then routed paths per layer and width w, separated by ;. In a path a pad name is that pad's centre, name@x,y a point inside that pad or via, vN(x,y) a via of type N, cw(c..) or ccw(c..) an arc to the next point about the centre after c; other vN are vias at no path point)
+1.8V: C28.2 C29.2 C30.2 C31.2 J4.1 R13.2
+1.8V_JTAG: C11.2 C12.2 U2.12 U2.37 U2.49 U2.64
+1V8: C19.2 U1.79 U1.88 U1.102 U9.2
+3.3V: C3.2 C4.2 C5.2 C6.2 C7.2 C13.2 C20.2 C21.2 C22.2 C23.2 C24.2 C25.2 C26.2 C27.2 C32.2 C33.2 C34.2 C35.2 C36.2 C37.2 C38.2 C39.2 J1.1 J3.1 L1.1 L2.1 R1.2 R2.2 R3.2 R5.2 R7.2 R8.2 R9.2 R12.2 U2.20 U2.31 U2.42 U2.50 U2.56 U3.6 U3.8
+3V3: C17.2 C18.2 U1.7 U1.16 U1.30 U1.36 U1.37 U1.51 U1.66 U1.72 U1.108 U1.118 U1.123 U1.135 U1.144 U8.2 U8.4 U9.3
+5V_USB: C10.2 C16.2 J2.1 L3.1 R11.2 U8.3
FPGA_TCK: J1.4 R4.2 U1.131 U2.16
FPGA_TDI: J1.8 R2.1 U1.136 U2.17
FPGA_TDO: J1.6 R3.1 U1.137 U2.18
FPGA_TMS: J1.2 R1.1 U1.130 U2.19
FTDI_RX: U1.117 U2.38
FTDI_TX: U1.115 U2.39
GND: C1.1 C2.1 C3.1 C4.1 C5.1 C6.1 C7.1 C8.1 C9.1 C10.1 C11.1 C12.1 C13.1 C14.1 C15.1 C16.1 C17.1 C18.1 C19.1 C20.1 C21.1 C22.1 C23.1 C24.1 C25.1 C26.1 C27.1 C28.1 C29.1 C30.1 C31.1 C32.1 C33.1 C34.1 C35.1 C36.1 C37.1 C38.1 C39.1 D1.K D2.K D3.K J1.3 J1.5 J1.9 J2.2 J3.2 J4.2 R4.1 R6.1 U1.8 U1.18 U1.29 U1.46 U1.53 U1.64 U1.80 U1.90 U1.101 U1.116 U1.124 U1.134 U2.1 U2.5 U2.10 U2.11 U2.13 U2.15 U2.25 U2.35 U2.47 U2.51 U3.5 U8.1 U9.1 USB1.0 USB1.4 USB1.5 X1.2 X1.4
NetC1_2: C1.2 C2.2 L1.2 U2.9
NetC8_2: C8.2 C9.2 L2.2 U2.4
NetC14_2: C14.2 U2.2 X1.1
NetC15_2: C15.2 U2.3 X1.3
NetD1_A: D1.A R11.1
NetD2_A: D2.A R12.1
NetD3_A: D3.A R13.1
NetL3_2: L3.2 USB1.1
NetR5_1: R5.1 U2.14
NetR6_2: R6.2 U2.6
NetR7_1: R7.1 R10.2 U3.4
NetR8_1: R8.1 U2.62 U3.2
NetR9_1: R9.1 U2.63 U3.1
NetR10_1: R10.1 U2.61 U3.3
USB_D_N: U2.7 USB1.2
USB_D_P: U2.8 USB1.3
pads on no net: J1.7 J1.10 J?.1 J?.2 U1.1 U1.2 U1.3 U1.4 U1.5 U1.6 U1.9 U1.10 U1.11 U1.12 U1.13 U1.14 U1.15 U1.17 U1.19 U1.20 U1.21 U1.22 U1.23 U1.24 U1.25 U1.26 U1.27 U1.28 U1.31 U1.32 U1.33 U1.34 U1.35 U1.38 U1.39 U1.40 U1.41 U1.42 U1.43 U1.44 U1.45 U1.47 U1.48 U1.49 U1.50 U1.52 U1.54 U1.55 U1.56 U1.57 U1.58 U1.59 U1.60 U1.61 U1.62 U1.63 U1.65 U1.67 U1.68 U1.69 U1.70 U1.71 U1.73 U1.74 U1.75 U1.76 U1.77 U1.78 U1.81 U1.82 U1.83 U1.84 U1.85 U1.86 U1.87 U1.89 U1.91 U1.92 U1.93 U1.94 U1.95 U1.96 U1.97 U1.98 U1.99 U1.100 U1.103 U1.104 U1.105 U1.106 U1.107 U1.109 U1.110 U1.111 U1.112 U1.113 U1.114 U1.119 U1.120 U1.121 U1.122 U1.125 U1.126 U1.127 U1.128 U1.129 U1.132 U1.133 U1.138 U1.139 U1.140 U1.141 U1.142 U1.143 U2.21 U2.22 U2.23 U2.24 U2.26 U2.27 U2.28 U2.29 U2.30 U2.32 U2.33 U2.34 U2.36 U2.40 U2.41 U2.43 U2.44 U2.45 U2.46 U2.48 U2.52 U2.53 U2.54 U2.55 U2.57 U2.58 U2.59 U2.60 U3.7 U4.1 U4.2 U4.3 U4.4 U4.5 U4.6 U4.7 U4.8 U4.9 U4.10 U4.11 U4.12 U4.13 U4.14 U4.15 U4.16 U4.17 U4.18 U4.19 U4.20 U4.21 U4.22 U4.23 U4.24 U4.25 U4.26 U4.27 U4.28 U4.29 U4.30 U4.31 U4.32 U4.33 U4.34 U4.35 U4.36 U4.37 U4.38 U4.39 U4.40 U4.41 U4.42 U4.43 U4.44 U4.45 U4.46 U4.47 U4.48 U4.49 U5.1 U5.2 U5.3 U5.4 U5.5 U5.6 U5.7 U5.8 U5.9 U5.10 U5.11 U5.12 U5.13 U5.14 U5.15 U5.16 U5.17 U5.18 U5.19 U5.20 U5.21 U5.22 U5.23 U5.24 U5.25 U5.26 U5.27 U5.28 U5.29 U5.30 U5.31 U5.32 U5.33 U5.34 U5.35 U5.36 U5.37 U5.38 U5.39 U5.40 U5.41 U5.42 U5.43 U5.44 U5.45 U5.46 U5.47 U5.48 U5.49 U6.1 U6.2 U6.3 U6.4 U6.5 U6.6 U6.7 U6.8 U6.9 U6.10 U6.11 U6.12 U6.13 U6.14 U6.15 U6.16 U6.17 U6.18 U6.19 U6.20 U6.21 U6.22 U6.23 U6.24 U6.25 U6.26 U6.27 U6.28 U6.29 U6.30 U6.31 U6.32 U6.33 U6.34 U6.35 U6.36 U6.37 U6.38 U6.39 U6.40 U6.41 U6.42 U6.43 U6.44 U6.45 U6.46 U6.47 U6.48 U6.49 U7.1 U7.2 U7.3 U7.4 U7.5 U7.6 U7.7 U7.8 U7.9 U7.10 U7.11 U7.12 U7.13 U7.14 U7.15 U7.16 U7.17 U7.18 U7.19 U7.20 U7.21 U7.22 U7.23 U7.24 U7.25 U7.26 U7.27 U7.28 U7.29 U7.30 U7.31 U7.32 U7.33 U7.34 U7.35 U7.36 U7.37 U7.38 U7.39 U7.40 U7.41 U7.42 U7.43 U7.44 U7.45 U7.46 U7.47 U7.48 U7.49
copper on no net:
  other v1: 80.8,17.8 81.9,17.8 83,17.8 84.1,17.8 85.2,17.8 80.8,18.9 81.9,18.9 83,18.9 84.1,18.9 85.2,18.9 80.8,20 81.9,20 83,20 84.1,20 85.2,20 80.8,21.1 81.9,21.1 83,21.1 84.1,21.1 85.2,21.1 80.8,22.2 81.9,22.2 83,22.2 84.1,22.2 85.2,22.2 80.8,37.8 81.9,37.8 83,37.8 84.1,37.8 85.2,37.8 80.8,38.9 81.9,38.9 83,38.9 84.1,38.9 85.2,38.9 80.8,40 81.9,40 83,40 84.1,40 85.2,40 80.8,41.1 81.9,41.1 83,41.1 84.1,41.1 85.2,41.1 80.8,42.2 81.9,42.2 83,42.2 84.1,42.2 85.2,42.2 80.8,57.8 81.9,57.8 83,57.8 84.1,57.8 85.2,57.8 80.8,58.9 81.9,58.9 83,58.9 84.1,58.9 85.2,58.9 80.8,60 81.9,60 83,60 84.1,60 85.2,60 80.8,61.1 81.9,61.1 83,61.1 84.1,61.1 85.2,61.1 80.8,62.2 81.9,62.2 83,62.2 84.1,62.2 85.2,62.2 80.55,77.8 81.65,77.8 82.75,77.8 83.85,77.8 84.95,77.8 80.55,78.9 81.65,78.9 82.75,78.9 83.85,78.9 84.95,78.9 80.55,80 81.65,80 82.75,80 83.85,80 84.95,80 80.55,81.1 81.65,81.1 82.75,81.1 83.85,81.1 84.95,81.1 80.55,82.2 81.65,82.2 82.75,82.2 83.85,82.2 84.95,82.2

## Text inside footprints (layer, text, board x,y; h text height)
J1: Top Overlay "9" at 29.66,94.47 h1.02 r180; Top Overlay "10" at 29.66,91.93 h1.02 r180; Top Overlay "2" at 42.94,91.99 h1.02 r180; Top Overlay "1" at 42.64,94.53 h1.02 r180
U1: Mechanical 13 "*" at 59.931,41.635 h1.27 r180